# Altium PCB PDM Mk 21 - Mini.PcbDoc
Units mm, origin at the board's own origin, x right, y up, seen from the top; angles counter-clockwise.
Board outline 52.25 x 23 mm, 4 copper layers (Top Layer, Signal Layer, Ground Layer, Bottom Layer), stack 0.778 mm thick; 24 components, 18 nets, 73 pads, 66 vias.
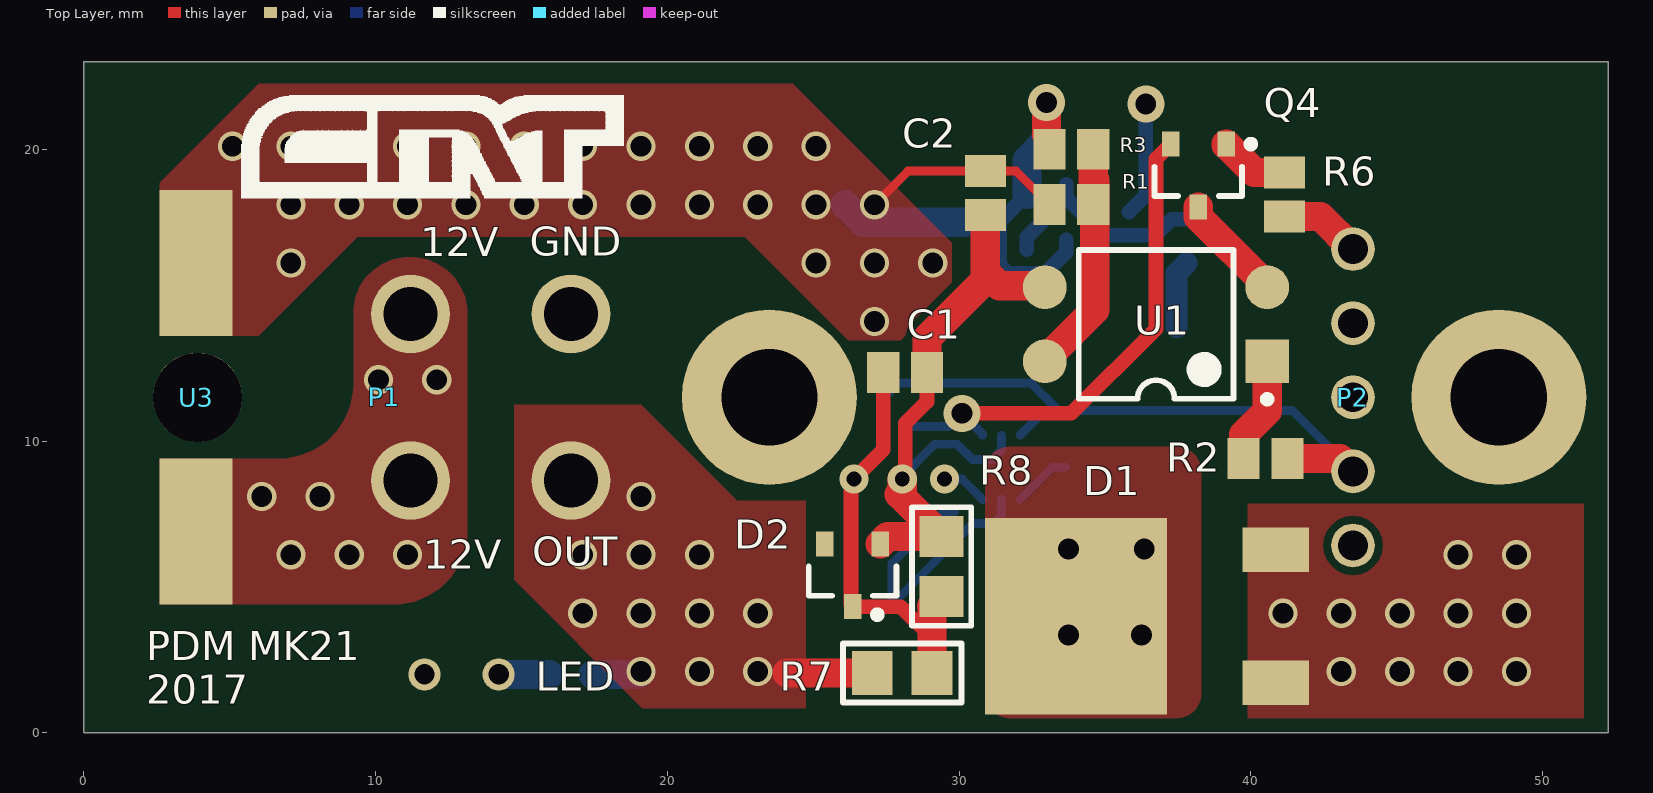
[diagram p0: Top Layer view]
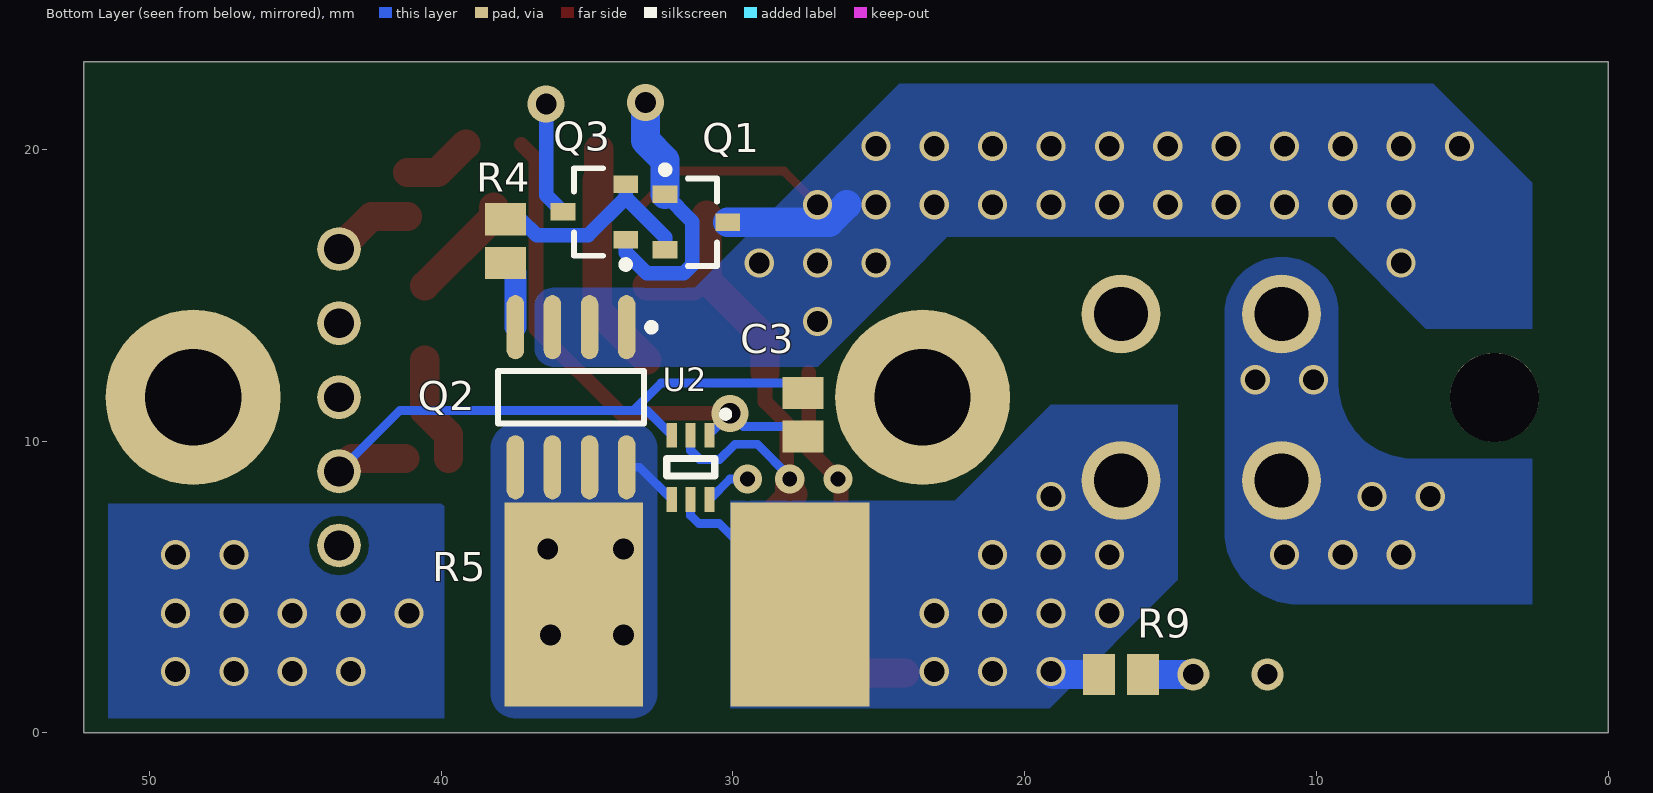
[diagram p1: Bottom Layer view, seen from below]
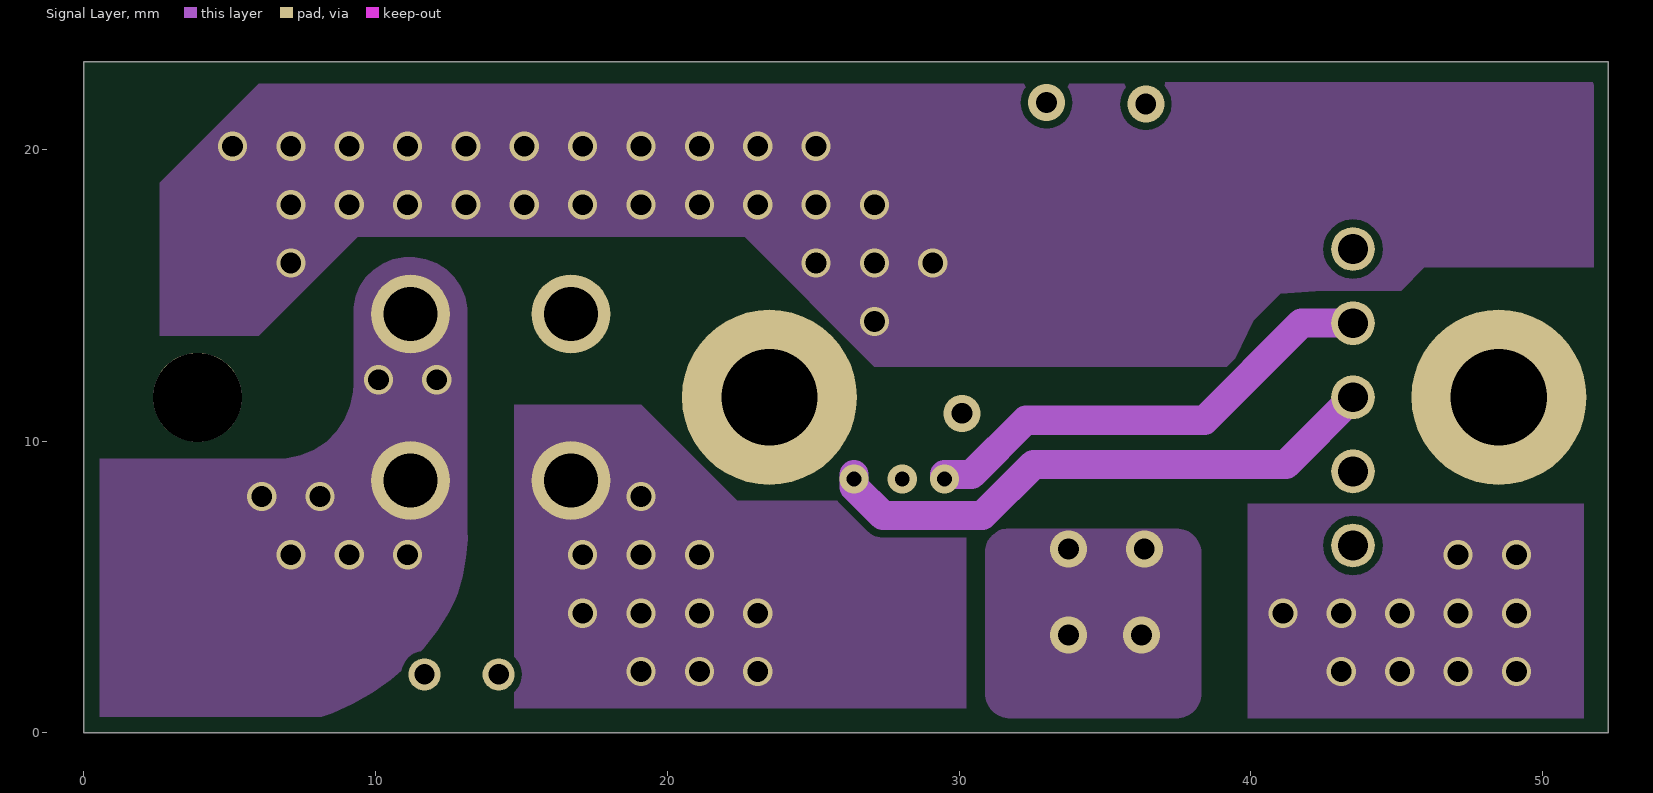
[diagram p2: Signal Layer]
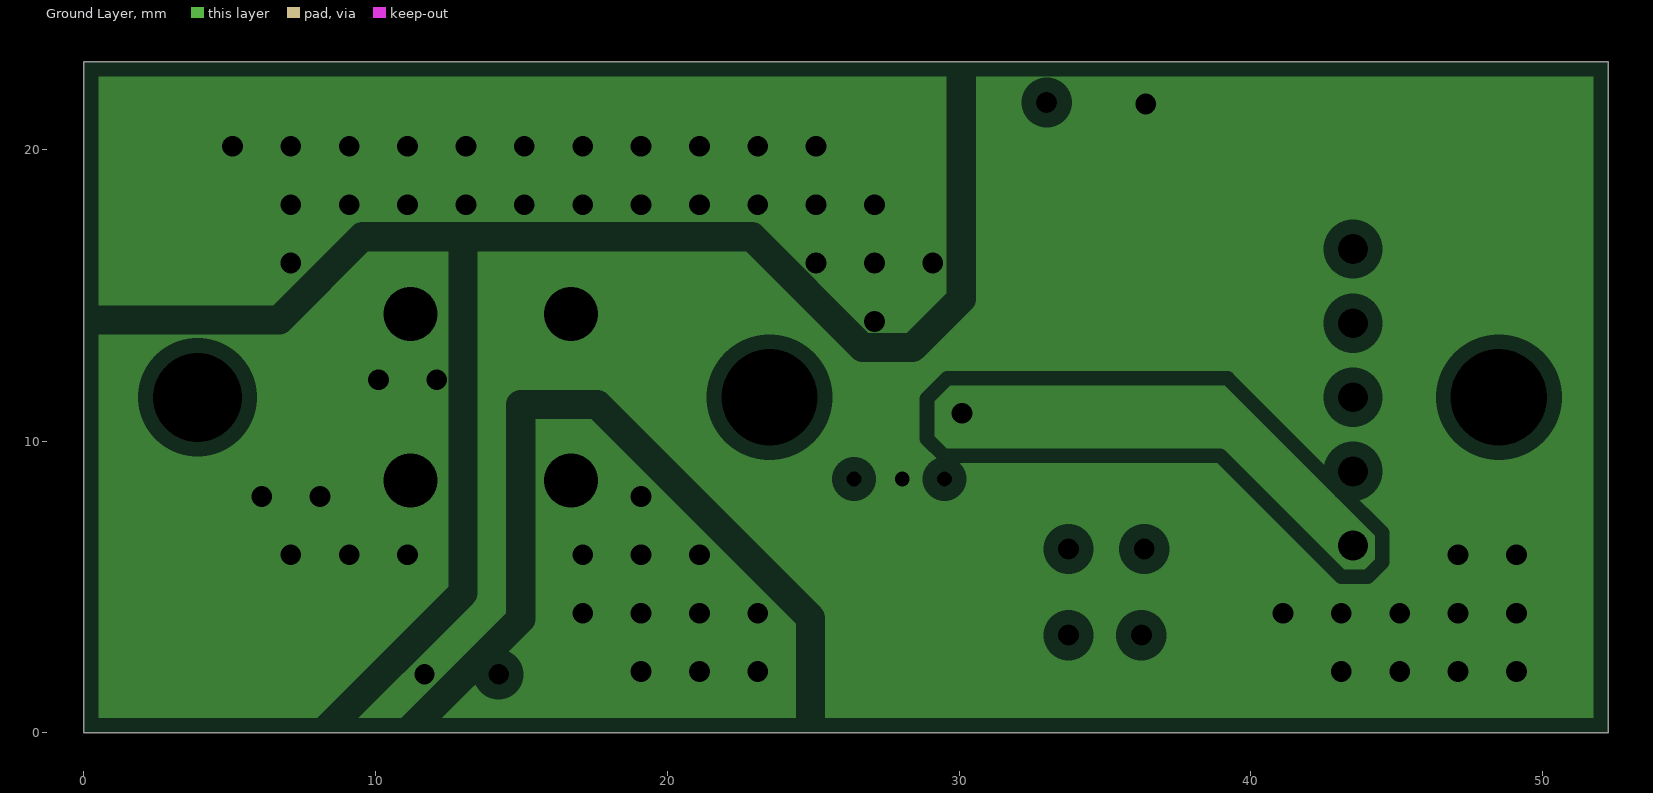
[diagram p3: Ground Layer, clearances drawn from the general rule]

## Layer stack, top to bottom
Top Solder: solder mask 0.0102, Solder Resist, Dk 3.5
Top Layer: signal copper 0.0356
Dielectric 1: core 0.254, FR-4, Dk 4.2
Signal Layer: signal copper 0.036
Dielectric 3: prepreg 0.127, Dk 4.2
Ground Layer: plane copper 0.036, net (Multiple Nets)
Dielectric 2: core 0.254, Dk 4.2
Bottom Layer: signal copper 0.0356
Bottom Solder: solder mask 0.0102, Solder Resist, Dk 3.5

## Board outline
0,0 0,23 52.25,23 52.25,0

## Design rules (kind name [scope] priority, off if disabled: settings)
Clearance [All] p1: gap=0.254
ComponentClearance [All] p1: gap=0 collisioncheckmode=3 verticalgap=0 showdistances=FALSE
HoleSize [All] p1: absolutevalues=TRUE maxlimit=60 minlimit=0.025 maxpercent=80.000 minpercent=20.000
MinimumSolderMaskSliver [All] p1: minsoldermaskwidth=0.15
PlaneClearance [All] p1: clearance=0.508
PlaneConnect [All] p1: planeconnectstyle=Direct reliefexpansion=0.508 reliefentries=4 reliefconductorwidth=0.254 reliefairgap=0.254
PolygonConnect [All] p1: connectstyle=Direct reliefconductorwidth=0.254 reliefentries=4 polygonreliefangle="90 Angle" airgapwidth=0.254
RoutingVias [All] p1: holewidth=0.711 width=1.27 viastyle="Through Hole" minholewidth=0.2 minwidth=0.5 maxholewidth=0.711 maxwidth=1.27
SilkToSolderMaskClearance [IsPad] p1: minsilkscreentomaskgap=0.15 clearancetoexposedcopper=TRUE
SolderMaskExpansion [All] p1: expansion=0.102
Width [All] p1: maxlimit=2 minlimit=0.3 preferedwidth=0.7
24 further rules are at their usual default settings.

## Components (designator, comment, footprint, x,y, rotation, side; value= is the part's Value field where it differs from the comment)
C1 "Cap" C0805 28.15,12.35 r180 top
C2 "Cap" C0805 30.9,18.5 r90 top
C3 "Cap" C0805 27.6,10.9 r90 bottom
D1 "VS-12CWQ06FNPbF" DPAK 40.85,4 r90 top
D2 "3.6v" BZX84CxxxET1G 26.35,5.4 r270 top
LED "" LED-0 12.95,2 r0 top
P1 "Mega-fit 4 pin connector" "Mega-fit 4 pin connector" 3.9,11.5 r90 top
P2 "Board to board 2.5mm jumper pins" "Board-Board Jumper" 43.5,11.5 r0 top
Q1 "BC848" SOT-23_L 31.25,17.5 r180 bottom
Q2 "IRFU9310PbF" SO8_N 35.55,11.5 r270 bottom
Q3 "BC858" SOT-23_L 34.75,17.85 r0 bottom
Q4 "NPN" SOT-23_L 38.2,19.1 r270 top
R1 "GND" C0805 33.85,18.1 r0 top
R2 "GND" C0805 40.5,9.4 r180 top
R3 "GND" C0805 33.85,20 r180 top
R4 "Res1" C0805 37.8,16.85 r270 bottom
R5 "CRS1050 3Ohm" CRS1050 35.45,4.4 r180 bottom
R6 "IN" C0805 41.15,18.45 r90 top
R7 "Low Drift" R0805 28.05,2.05 r180 top
R8 "Low Drift" R0805 29.4,5.7 r270 top
R9 "GND" C0805 16.702,2 r180 bottom
U1 "LTV816S" DIP-4 36.75,14 r180 top
U2 "High side current sense amplifier" INA212 30.8,10.2 r0 bottom
U3 "Fuse" Fuse 3.85,6.9 r180 top

## Footprints (in the part's own frame and the unit in brackets; to place one, negate y for a bottom-side part, rotate by r counter-clockwise, add the part's x,y. Pads: shape width x height; smd on the part's side, far side on the other; paste and mask are expansions set on the pad)
"Board-Board Jumper" [mm] "Board to board 2.54mm header pins"
  round 1.5 hole 1.02: 1(0,5.08) 2(0,2.54) 3(0,0) 4(0,-2.54) 5(0,-5.08)
  body extent -1.27,-6.35 1.27,6.35, height 9.5
BZX84CxxxET1G [mm] "SOT23, 3-Leads, Body 2.9x1.3mm, Pitch 0.95mm, Lead Span 2.3mm - Reverse Pinning, IPC High Density"
  rect 0.85x0.6 smd: 1(-1.075,0.95) 2(1.075,0) 3(-1.075,-0.95)
  silkscreen extent -0.3,-1.5 1.47,1.5, body extent -0.7,-1.5 0.7,1.5, height 1.1
C0805 [mm]
  rect 1.1x1.4 smd: 1(-0.75,0) 2(0.75,0)
  body extent -1.1,-0.72 1.1,0.72, height 1.4
CRS1050 [mm] "3mOhm current shunt resistor footprint"
  rect 4.75x7 smd: 1(0,0) 2(7.75,0)
  body extent -1.37,-2.5 9.13,2.5, height 0.9
DIP-4 [mm]
  rect 1.5x1.5 smd: 1(-3.81,1.27)
  round 1.5 smd: 2(-3.81,-1.27) 3(3.81,-1.27) 4(3.81,1.27)
  silkscreen extent -3.94,-2.55 2.65,2.69, body extent -3.15,-2.5 3.15,2.5, height 5.6
DPAK [mm]
  rect 6.74x6.23 smd: 1(0,6.84)
  rect 1.524x2.28 smd: 3(-2.28,0) 3(2.28,0)
  body extent -3.43,-0.25 3.43,8.89, height 2.3
Fuse [mm] "Surface mount pads for standard self-resetting fuse"
  rect 2.5x5 smd: 1(0,0) 2(0,-9.2)
INA212 [mm] "Current Amplifier"
  rect 0.35x0.85 smd: 1(0,0) 2(0.65,0) 3(1.3,0) 4(1.3,2.2) 5(0.65,2.2) 6(0,2.2)
  silkscreen extent -0.65,-0.82 1.48,1.4, body extent -0.42,0.4 1.73,1.8, height 1.1
LED-0 [mm] "LED; 2 Leads"
  round 1.1 hole 0.7: 1(1.27,0) 2(-1.27,0)
"Mega-fit 4 pin connector" [mm] "MOLEX mega-fit 4 pin connector"
  round 3.05 hole 3.05: 0(0,0)
  round 2.7 hole 1.85: 1(2.85,-7.3) 2(2.85,-12.8) 3(-2.85,-12.8) 4(-2.85,-7.3)
  body extent -6.03,-13.36 6.03,8.6, height 15.62
R0805 [mm]
  rect 1.4x1.5 smd: 1(-1.025,0) 2(1.025,0)
  silkscreen extent -2.03,-1.02 2.03,1.02, body extent -1.4,-0.76 1.4,0.76, height 1
SO8_N [mm] "SOIC, 8-Leads, Body 4.9x3.9mm, Pitch 1.27mm, IPC Medium Density"
  oval 2.2x0.6 smd: 1(-2.4,1.905) 2(-2.4,0.635) 3(-2.4,-0.635) 4(-2.4,-1.905) 5(2.4,-1.905) 6(2.4,-0.635) 7(2.4,0.635) 8(2.4,1.905)
  silkscreen extent -2.52,-2.5 0.9,2.88, body extent -2,-2.5 2,2.5, height 1.75
SOT-23_L [mm] "SOT23, 3-Leads, Body 2.9x1.3mm, Pitch 0.95mm, Lead Span 2.5mm, IPC High Density"
  rect 0.85x0.6 smd: 1(-1.075,0.95) 2(-1.075,-0.95) 3(1.075,0)
  silkscreen extent -1.2,-1.5 0.7,1.92, body extent -0.7,-1.5 0.7,1.5, height 1.1

## Part data
C1 C2 C3: "Capacitor"
D1: library part MBR1645, "Schottky Rectifier"
D2: library part "D Zener", "Zener Diode"
LED: library part LED0, "Typical INFRARED GaAs LED"
P1: "MOLEX mega-fit 4 pin connector"
P2: library part "Board-Board Jumper"
Q1 Q4: library part BC817-25, "NPN General Purpose Amplifier"
Q2: library part IRF7220, "HEXFET Power MOSFET - International Rectifier"
Q3: library part BC807-16, "PNP General Purpose Amplifier"
R1 R2 R3 R6 R9: library part Res1, "Resistor"
R4: "Resistor"
R5: library part CSR1050, "Current Shunt Resistor"
R7 R8: library part Res2, "Resistor"
U1: library part Optoisolator1, "4-Pin Phototransistor Optocoupler"
U2: library part INA212

## Free pads (board coordinates)
  round 6 hole 3.3: 0(48.5,11.5) 1(23.5,11.5)

## Via types
v1: diameter 1, hole 0.711, Top Layer to Bottom Layer, tented both sides, 56 vias
v2: diameter 1.27, hole 0.711, Top Layer to Bottom Layer, 7 vias
v3: diameter 1, hole 0.5, Top Layer to Bottom Layer, 3 vias

## Nets (pads, with @x,y where several pads share a name; then routed paths per layer and width w, separated by ;. In a path a pad name is that pad's centre, name@x,y a point inside that pad or via, vN(x,y) a via of type N, cw(c..) or ccw(c..) an arc to the next point about the centre after c; other vN are vias at no path point)
3.3V: C3.2 P2.4 R2.1 U2.3 | length 21.4
  Top Layer w1: R2.1 43.06,9.4 P2.4
  Bottom Layer w0.3: C3.2 27.939,11.989 29.67,11.989 32.461,11.989 33.4,11.05 ; P2.4 41.41,11.05 33.4,11.05 ; U2.3@32.115,10.215 32.95,11.05 33.4,11.05 ; U2.3@32.115,10.215 U2.3 32.1,10.231 U2.3@32.115,10.215
12V_FUSED: C2.2 Q1.3 Q2.1 Q2.2 Q2.3 R1.1 U3.2 | length 11.3
  Top Layer w0.3: v1(27.1,18.1) 28.25,19.25 C2.2 31.95,19.25 R1.1
  Bottom Layer w1: 26.1,18.1 26.7,17.5 Q1.3
  other v1: 27.1,14.1 7.1,16.1 25.1,16.1 27.1,16.1 29.1,16.1 7.1,18.1 9.1,18.1 11.1,18.1 13.1,18.1 15.1,18.1 17.1,18.1 19.1,18.1 21.1,18.1 23.1,18.1 25.1,18.1 5.1,20.1 7.1,20.1 9.1,20.1 11.1,20.1 13.1,20.1 15.1,20.1 17.1,20.1 19.1,20.1 21.1,20.1 23.1,20.1 25.1,20.1
CURRENT_MEASUREMENT: P2.2 U2.6 | length 18
  Signal Layer w1: v3@29.5,8.85 30.427,8.85 32.288,10.712 38.412,10.712 41.74,14.04 P2.2
  Bottom Layer w0.3: v3@29.5,8.85 v3@29.533,8.817 ; v3@29.617,8.817 v3(29.5,8.7) 30.1,8.7 U2.6
CURRENT_SHUNT_+: D1.1 Q2.5 Q2.6 Q2.7 Q2.8 R5.1 U2.4 | length 2
  Bottom Layer w0.3: U2.4 33.2,9.1 Q2.8
  other v2: 33.75,3.35 36.25,3.35 33.75,6.3 36.35,6.3
GND: C1.1 C2.1 D1.3 D2.1 LED.2 P1.2 Q3.3 R8.1 U1.3 U2.2 | length 25.9
  Top Layer w0.5: v3(28.05,8.7) 28.05,8.95 28.154,9.054 28.154,10.604 28.9,11.35 C1.1
  Top Layer w1: D2.1 27.55,6.725 R8.1 27.95,8.175 28.05,8.275 v3(28.05,8.7) ; C1.1 28.9,13.52 31.045,15.665 ; C2.1 30.9,15.81 31.045,15.665 ; U1.3@32.94,15.32 31.39,15.32 31.045,15.665
  Bottom Layer w0.3: v3(28.05,8.7) 28.05,8.779 29.16,9.889 29.93,9.889 30.448,9.371 31.142,9.371 31.45,9.679 U2.2
  Bottom Layer w0.5: Q3.3 36.4,18.425 v2(36.4,21.55)
  other v1: 43.1,2.1 45.1,2.1 47.1,2.1 49.1,2.1 41.1,4.1 43.1,4.1 45.1,4.1 47.1,4.1 49.1,4.1 47.1,6.1 49.1,6.1
HIGH_POWER_OUT: P1.3 R5.2 R7.2 R9.1 U2.5 | length 14.5
  Top Layer w1: 24.1,2.05 R7.2
  Bottom Layer w0.3: R5.2@29.851,7.589 29.489,7.589 27.7,5.8 R5.2 30.471,7.171 31.171,7.171 31.45,7.45 U2.5
  Bottom Layer w1: R9.1 19,2 v1(19.1,2.1)
  other v1: 21.1,2.1 23.1,2.1 17.1,4.1 19.1,4.1 21.1,4.1 23.1,4.1 17.1,6.1 19.1,6.1 21.1,6.1 19.1,8.1
NetLED_1: LED.1 R9.2 | length 1.7
  Bottom Layer w1: LED.1 R9.2
NetQ1_1: Q1.1 Q3.1 R3.2 | length 10.5
  Top Layer w1: R3.2@33,20.5 v2(33,21.6)
  Bottom Layer w0.5: Q1.1 31.396,17.521 31.396,16.041 31.691,15.746 32.959,15.746 33.675,16.462 Q3.1
  Bottom Layer w1: Q1.1 32.325,19.625 33,20.3 v2(33,21.6)
NetQ1_2: Q1.2 Q3.2 R4.1 | length 7.7
  Bottom Layer w0.5: Q1.2 32.325,16.988 33.675,18.338 ; Q3.2 33.675,18.338 ; R4.1 37.283,17.6 36.729,17.046 34.967,17.046 33.675,18.338
NetQ2_4: Q2.4 R4.2 | length 2.3
  Bottom Layer w0.75: Q2.4 37.455,15.755 R4.2
NetQ4_1: Q4.1 R6.2 | length 2.4
  Top Layer w1: Q4.1@39.15,20.15 Q4.1 40.125,19.2 R6.2
NetQ4_3: Q4.3 U1.2 | length 3.7
  Top Layer w1: Q4.3 38.2,17.68 U1.2@40.56,15.32
NetR1_2: R1.2 R3.1 U1.4 | length 8.8
  Top Layer w1: U1.4@32.94,12.78 34.65,14.49 34.65,18.95 ; R1.2 R3.1
NetR2_2: R2.2 U1.1 | length 3.7
  Top Layer w1: R2.2 39.75,10.216 40.56,11.026 U1.1@40.56,12.78
SWITCHING_SIGNAL: P2.1 R6.1 | length 2.8
  Top Layer w1: R6.1 42.38,17.7 P2.1
UGND: C3.1 P2.5 Q4.2 U2.1 | length 17.4
  Top Layer w0.5: v2(30.1,10.95) 33.85,10.95 36.75,13.85 36.75,19.675 Q4.2
  Bottom Layer w0.3: 28.35,10.5 29.65,10.5 v2(30.1,10.95) 30.8,10.25 U2.1
"VCC 12V": P1.1 P1.4 U3.1
  other v1: 7.1,6.1 9.1,6.1 11.1,6.1 6.1,8.1 8.1,8.1 10.1,12.1 12.1,12.1
VOLTAGE_MEASUREMENT: C1.2 D2.2 P2.3 R7.1 R8.2 | length 33.6
  Top Layer w0.5: v3@26.296,8.7 26.296,4.379 D2.2 28,4.325 29.075,3.25 ; v3(26.4,8.7) 27.4,9.7 C1.2
  Top Layer w1: R8.2@29.05,4.325 29.075,4.35 29.075,3.25 R7.1 ; R7.1@29.1,2.325 R7.1@29.105,2.32
  Signal Layer w1: v3@26.4,8.85 v3(26.4,8.7) 26.4,8.436 27.39,7.446 30.796,7.446 32.55,9.2 41.2,9.2 P2.3
pads on no net: D2.3 P1.0

## Polygon pours and split planes (outlines as drawn)
GND on Top Layer "NONET_L-01_P-001" (solid, pour order 146): 39.9,0.5 39.9,7.85 41.8,7.85 51.4,7.85 51.4,0.5
GND on Top Layer "NONET_L-01_P-001" (solid, pour order 110): 39.9,7.85 41.8,7.85 41.8,2.35 39.9,2.35
CURRENT_SHUNT_+ on Top Layer "NONET_L-01_P-001" (solid, pour order 130): 38.3,1.35 cw(c37.45,1.35) 37.45,0.5 31.75,0.5 cw(c31.75,1.35) 30.9,1.35 30.9,8.95 cw(c31.75,8.95) 31.75,9.8 37.45,9.8 cw(c37.45,8.95) 38.3,8.95
"VCC 12V" on Top Layer "NONET_L-01_P-001" (solid, pour order 132): 2.6,9.4 6.71,9.4 ccw(c6.71,11.94) 9.25,11.94 9.25,14.35 9.25,14.4 cw(c11.15,14.4) 11.15,16.3 11.2,16.3 cw(c11.2,14.35) 13.15,14.35 13.15,6.94 cw(c10.61,6.94) 10.61,4.4 2.6,4.4
12V_FUSED on Top Layer "NONET_L-01_P-001" (solid, pour order 140): 2.6,13.6 2.6,18.85 6,22.25 24.3,22.25 29.75,16.8 29.75,15.2 28,13.45 26.2,13.45 22.65,17 9.4,17 6,13.6
HIGH_POWER_OUT on Top Layer "NONET_L-01_P-001" (solid, pour order 144): 24.75,7.95 22.4,7.95 19.1,11.25 14.75,11.25 14.75,5.25 19.15,0.85 24.75,0.85
CURRENT_SHUNT_+ on Bottom Layer "NONET_L-01_P-001" (solid, pour order 128): 37.45,10.6 cw(c37.45,9.75) 38.3,9.75 38.3,1.35 cw(c37.45,1.35) 37.45,0.5 33.45,0.5 cw(c33.45,1.35) 32.6,1.35 32.6,9.75 cw(c33.45,9.75) 33.45,10.6
"VCC 12V" on Bottom Layer "NONET_L-01_P-001" (solid, pour order 134): 2.6,9.4 6.71,9.4 ccw(c6.71,11.94) 9.25,11.94 9.25,14.1 9.25,14.4 cw(c11.15,14.4) 11.15,16.3 11.2,16.3 cw(c11.2,14.35) 13.15,14.35 13.15,6.94 cw(c10.61,6.94) 10.61,4.4 2.6,4.4
12V_FUSED on Bottom Layer "NONET_L-01_P-001" (solid, pour order 138): 36.15,15.25 cw(c36.15,14.6) 36.8,14.6 36.8,13.9 36.8,13.2 cw(c36.15,13.2) 36.15,12.55 27.1,12.55 24.1,15.55 22.65,17 9.4,17 6.25,13.85 2.6,13.85 2.6,18.85 6,22.25 24.3,22.25 31.3,15.25
HIGH_POWER_OUT on Bottom Layer "NONET_L-01_P-001" (solid, pour order 142): 30.1,7.95 30.1,0.85 19.15,0.85 14.75,5.25 14.75,11.25 17.95,11.25 19.1,11.25 22.4,7.95
GND on Bottom Layer "NONET_L-01_P-001" (solid, pour order 156): 39.9,0.5 51.4,0.5 51.4,7.847 39.9,7.855
12V_FUSED on Signal Layer "NONET_L-01_P-001" (solid, pour order 162): 36.1,12.6 36.1,22.3 51.85,22.3 51.75,22.2 51.75,15.95 45.95,15.95 45.4,15.4 45.15,15.15 42.45,15.15 41,15.05 40.075,14.125 39.35,12.6
CURRENT_SHUNT_+ on Signal Layer "NONET_L-01_P-001" (solid, pour order 160): 38.3,1.35 cw(c37.45,1.35) 37.45,0.5 31.75,0.5 cw(c31.75,1.35) 30.9,1.35 30.9,6.2 cw(c31.7,6.2) 31.7,7 37.45,7 cw(c37.45,6.15) 38.3,6.15
HIGH_POWER_OUT on Signal Layer "NONET_L-01_P-001" (solid, pour order 148): 14.75,11.25 14.75,0.85 30.25,0.85 30.25,7.95 22.4,7.95 19.1,11.25
"VCC 12V" on Signal Layer "NONET_L-01_P-001" (solid, pour order 152): 0.55,9.4 6.71,9.4 ccw(c6.71,11.94) 9.25,11.94 9.25,13.42 9.25,14.4 cw(c11.149,14.4) 11.149,16.299 cw(c11.2,14.35) 13.15,14.35 13.15,6.94 cw(c6.792,6.851) 12.7,4.5 cw(c5.657,8.017) 8.15,0.55 5.35,0.55 0.55,0.55
12V_FUSED on Signal Layer "NONET_L-01_P-001" (solid, pour order 154): 2.6,18.85 6,22.25 24.3,22.25 37.4,22.25 39.2,22.25 36.94,16.35 39.775,19.875 39.2,22.25 39.2,17.9 39.2,12.55 36.94,12.55 34.99,12.55 27.1,12.55 22.65,17 9.4,17 6,13.6 2.6,13.6
GND on Signal Layer "NONET_L-01_P-001" (solid, pour order 158): 39.9,0.5 51.4,0.5 51.4,7.847 39.899,7.856
UGND on Ground Layer (split plane): 42.901,8.092 44.248,6.746 44.248,5.954 43.896,5.602 43.204,5.602 39.128,9.678 39.076,9.718 39.015,9.744 38.95,9.752 29.588,9.752 29.152,10.188 29.152,11.346 29.704,11.898 39.096,11.898
HIGH_POWER_OUT on Ground Layer (split plane): 24.408,3.732 24.408,0.51 12.295,0.51 15.332,3.548 15.395,3.624 15.441,3.711 15.47,3.805 15.479,3.903 15.479,10.748 17.392,10.748
GND on Ground Layer (split plane): 51.74,0.51 25.412,0.51 25.412,3.94 25.403,4.038 25.374,4.132 25.328,4.219 25.265,4.295 17.955,11.605 17.879,11.668 17.792,11.714 17.698,11.743 17.6,11.752 14.977,11.752 14.879,11.743 14.785,11.714 14.698,11.668 14.622,11.605 14.559,11.529 14.513,11.442 14.484,11.348 14.475,11.25 14.475,4.111 10.874,0.51 9.426,0.51 13.355,4.44 13.418,4.516 13.464,4.603 13.493,4.697 13.502,4.795 13.502,16.498 22.692,16.498 26.345,12.845 26.421,12.782 26.508,12.736 26.602,12.707 26.7,12.698 28.4,12.698 28.498,12.707 28.592,12.736 28.679,12.782 28.755,12.845 30.427,14.517 30.49,14.593 30.536,14.68 30.565,14.774 30.574,14.872 30.574,22.49 51.74,22.49
12V_FUSED on Ground Layer (split plane): 29.57,15.08 28.192,13.702 26.908,13.702 23.255,17.355 23.179,17.418 23.092,17.464 22.998,17.493 22.9,17.502 9.55,17.502 9.452,17.493 9.358,17.464 9.271,17.418 9.195,17.355 6.492,14.652 0.51,14.652 0.51,22.49 29.57,22.49
"VCC 12V" on Ground Layer (split plane): 12.498,5.003 8.005,0.51 0.51,0.51 0.51,13.648 6.7,13.648 6.798,13.657 6.892,13.686 6.979,13.732 7.055,13.795 9.758,16.498 12.498,16.498

## Other copper
Ground Layer (plane layer: these items are gaps in the copper):
  lines w0.254: 0.064,14.15 0.064,23 30.072,23 ; 7.525,0 8.205,0 ; 14.977,0 30.173,0
  lines w0.5: 28.9,10.083 28.9,11.45 29.6,12.15 39.2,12.15 43.079,8.271 44.5,6.85 44.5,5.85 44,5.35 43.1,5.35 38.95,9.5 29.483,9.5 28.9,10.083
  lines w1: 0.064,14.15 6.7,14.15 9.55,17 22.9,17 26.7,13.2 28.4,13.2 30.072,14.872 30.072,23 ; 8.205,0 13,4.795 13,17 ; 11.074,0 14.977,3.903 14.977,11.25 17.6,11.25 24.91,3.94 24.91,0

## Silkscreen, mask and mechanical layers (free items; w line width, h text height)
Top Overlay:
  region: 512 vertices and 4 holes, not listed, extent 5.406,18.325 18.511,21.846
  text "GND" at 15.28,16.35 h1
  text "12V" at 11.54,16.33 h1
  text "OUT" at 15.38,5.72 h1
  text "12V" at 11.63,5.62 h1
  text "PDM MK21  / 2017" at 2.14,0.99 h1